# Altium PCB RJ45-TH_R-RJ45R10P-B000_2021-12-01.pcbdoc
Units mm, origin at the board's own origin, x right, y up, seen from the top; angles counter-clockwise.
Board outline 58.23 x 61.34 mm, 2 copper layers (Top Layer, Bottom Layer); 4 components, 0 nets, 12 pads, 0 vias.
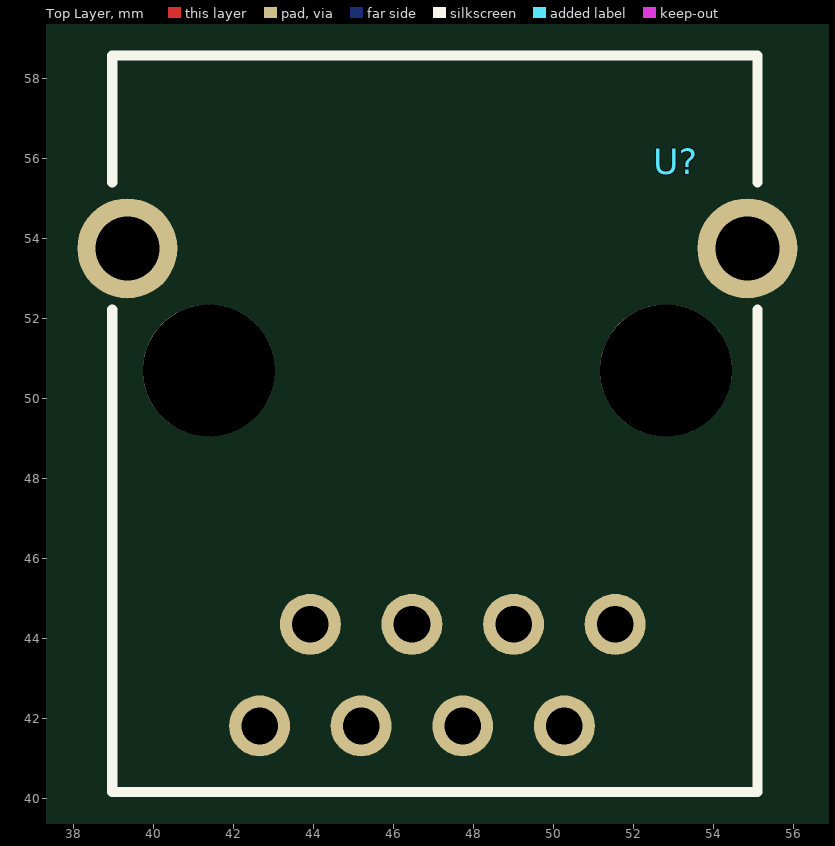
[diagram p0: Top Layer view]
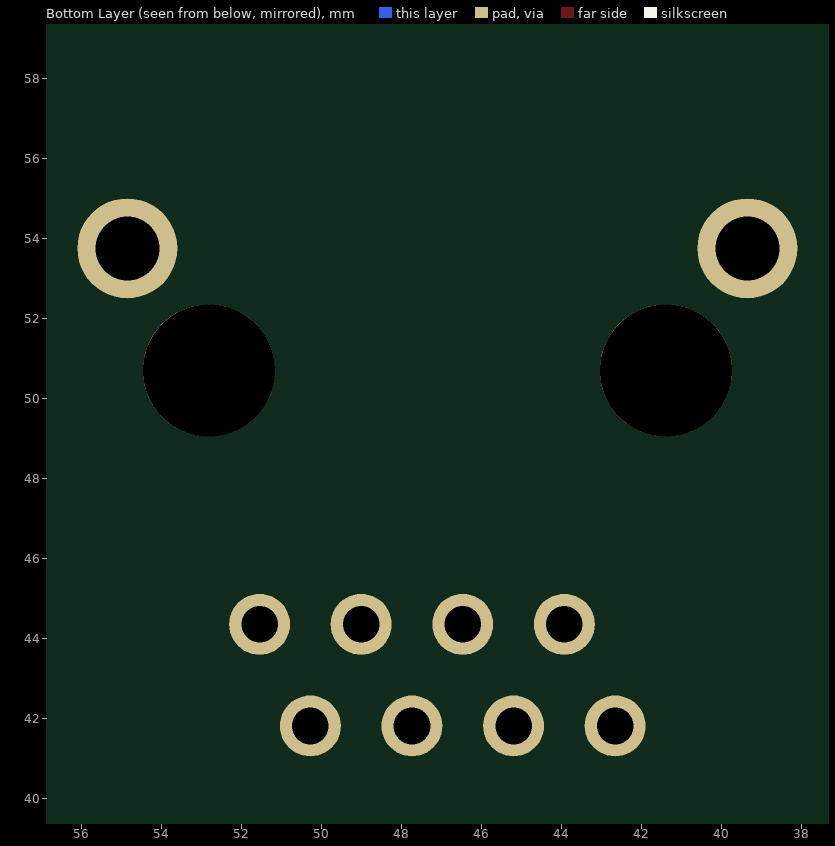
[diagram p1: Bottom Layer view, seen from below]

## Layer stack, top to bottom
Top Layer: signal copper (thickness not stored)
Dielectric: dielectric 0.32, FR-4, Dk 4.8
Bottom Layer: signal copper (thickness not stored)

## Board outline
83.634,25.4 25.4,25.4 25.4,86.736 83.634,86.736

## Components (designator, comment, footprint, x,y, rotation, side; value= is the part's Value field where it differs from the comment)
U? "RJ45-TH_R-RJ45R10P-B000" RJ45-TH_R-RJ45R10P-B000 53.056,55.941 r0 top
? "" ? 47.101,58.566 r0 top
? "" ? 47.101,63.746 r0 top
? "" ? 60.388,46.267 r0 top

## Footprints (in the part's own frame and the unit in brackets; to place one, negate y for a bottom-side part, rotate by r counter-clockwise, add the part's x,y. Pads: shape width x height; smd on the part's side, far side on the other; paste and mask are expansions set on the pad)
RJ45-TH_R-RJ45R10P-B000 [mm]
? [mm]

## Free pads (board coordinates)
  round 1.524 hole 0.914: 1(51.545,44.362) 2(50.275,41.822) 3(49.005,44.362) 4(47.735,41.822) 5(46.465,44.362) 6(45.195,41.822) 7(43.925,44.362) 8(42.655,41.822)
  round 2.5 hole 1.6: 9(39.35,53.762) 10(54.85,53.762)
  round 3.3 hole 3.3 unplated: ""(41.385,50.712) ""(52.815,50.712)

## Nets (pads, with @x,y where several pads share a name; then routed paths per layer and width w, separated by ;. In a path a pad name is that pad's centre, name@x,y a point inside that pad or via, vN(x,y) a via of type N, cw(c..) or ccw(c..) an arc to the next point about the centre after c; other vN are vias at no path point)

## Silkscreen, mask and mechanical layers (free items; w line width, h text height)
Top Overlay:
  lines w0.254: 38.972,52.237 38.972,40.172 39.2,40.172 55,40.172 55.101,40.172 55.101,52.237 ; 38.972,55.412 38.972,58.587 55.101,58.587 55.101,55.412